# Altium PCB ARDUINO_UNO_CH340.PcbDoc
Units mil, origin at the board's own origin, x right, y up, seen from the top; angles counter-clockwise.
Board outline 2700 x 2100 mil, 2 copper layers (Top Layer, Bottom Layer); 51 components, 51 nets, 211 pads, 45 vias.
Unrouted connection lines stored in the file: 5.
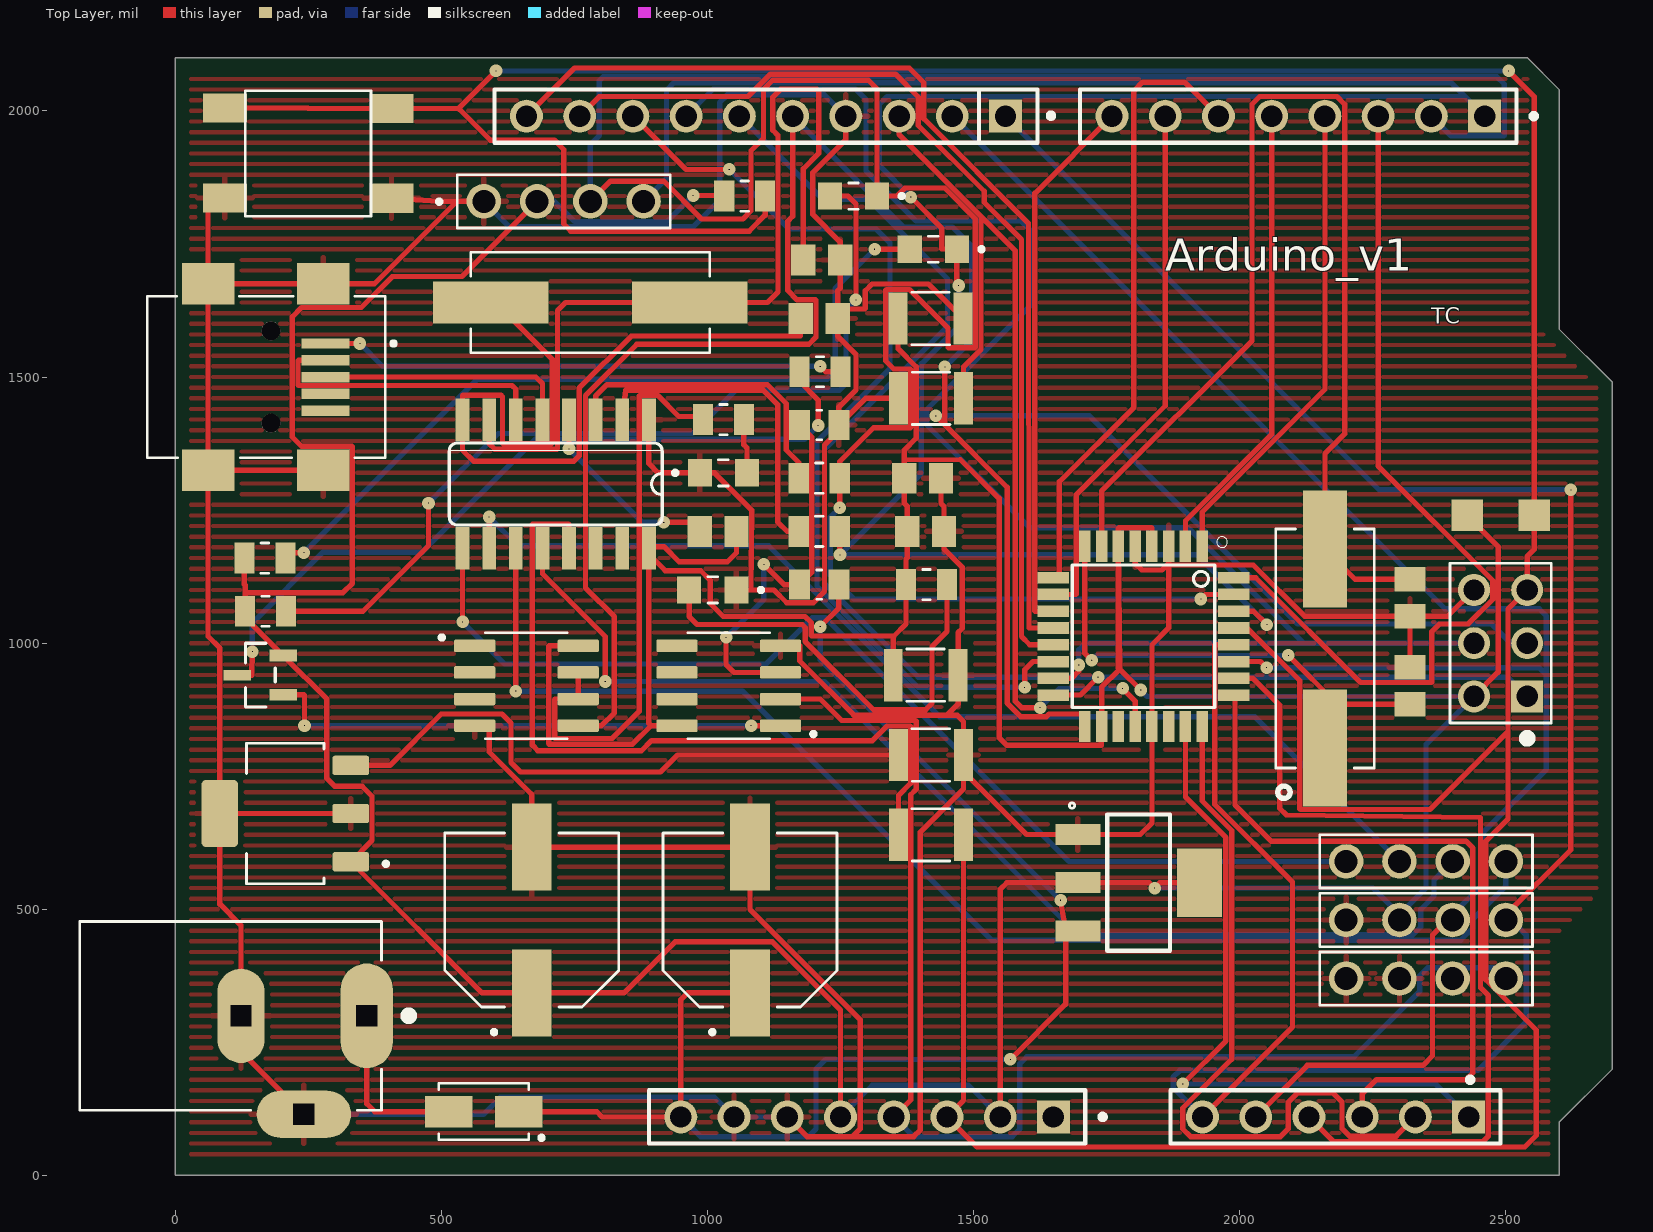
[diagram p0: Top Layer view]
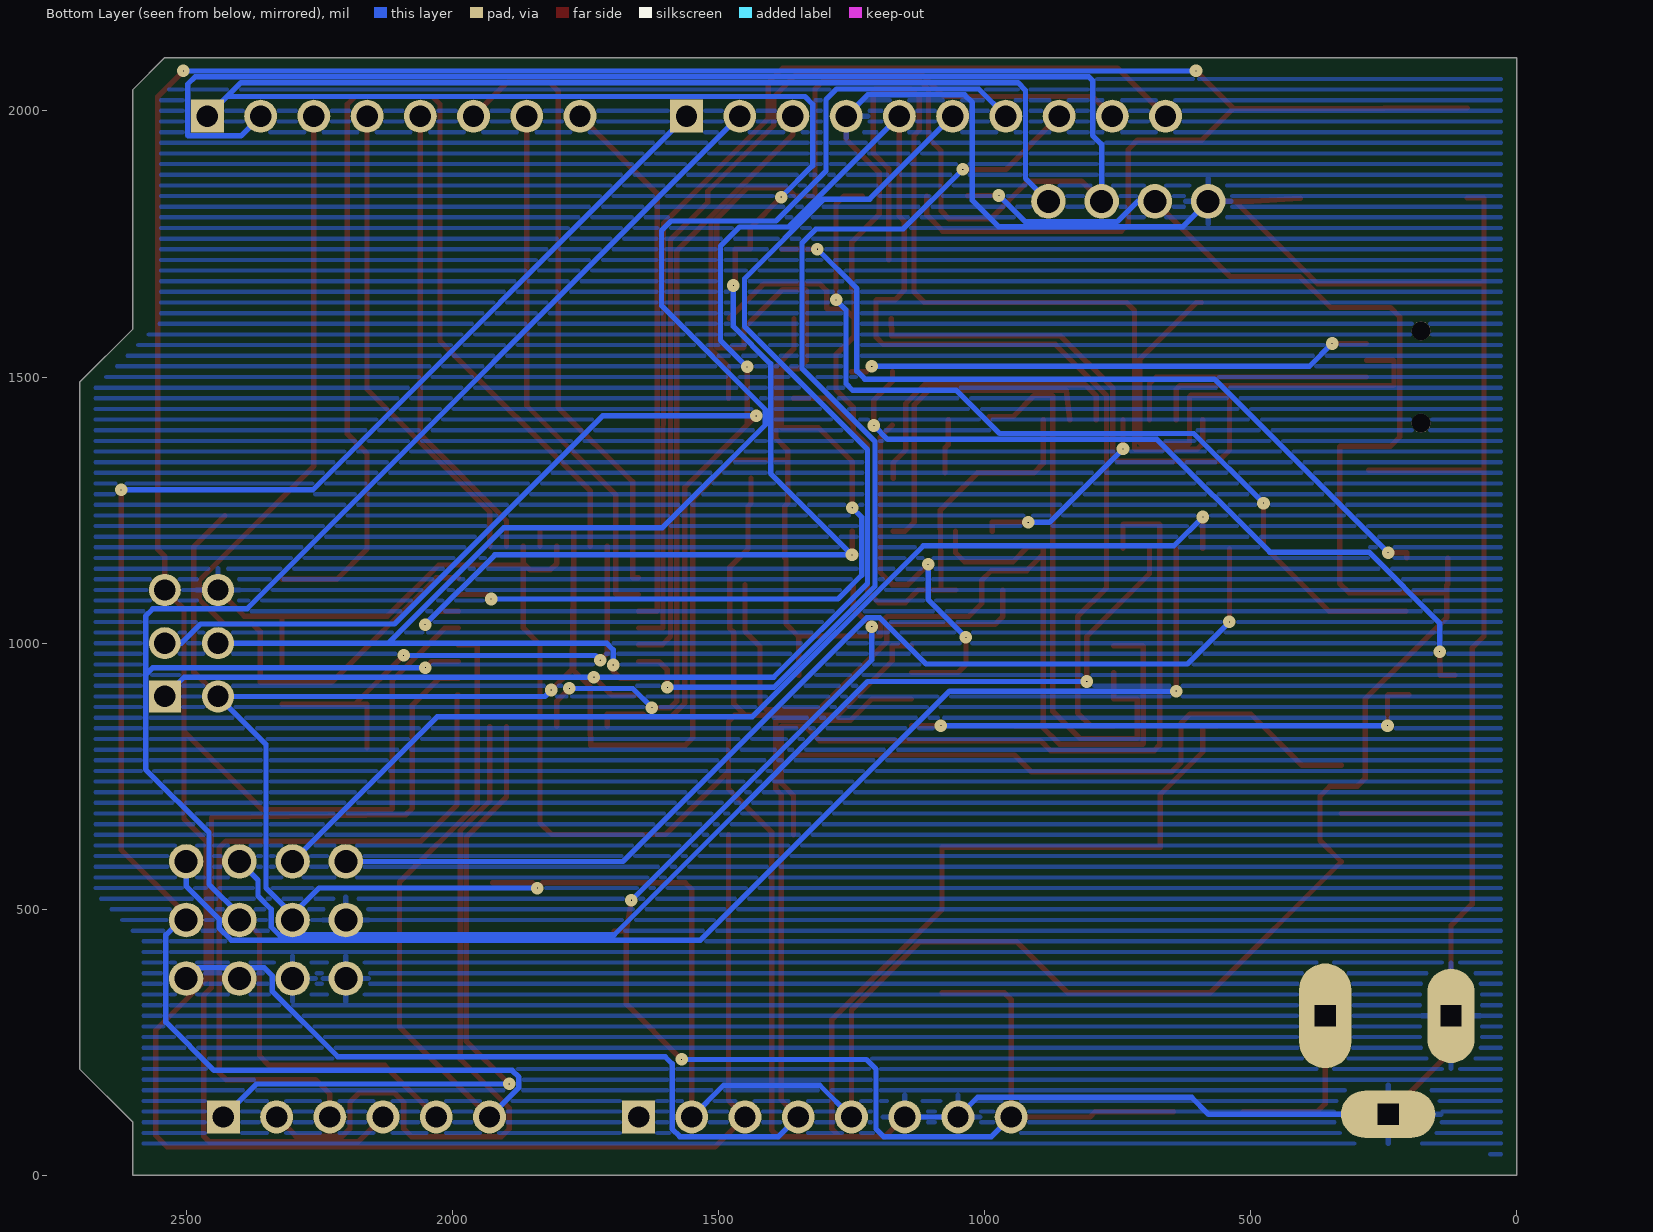
[diagram p1: Bottom Layer view, seen from below]
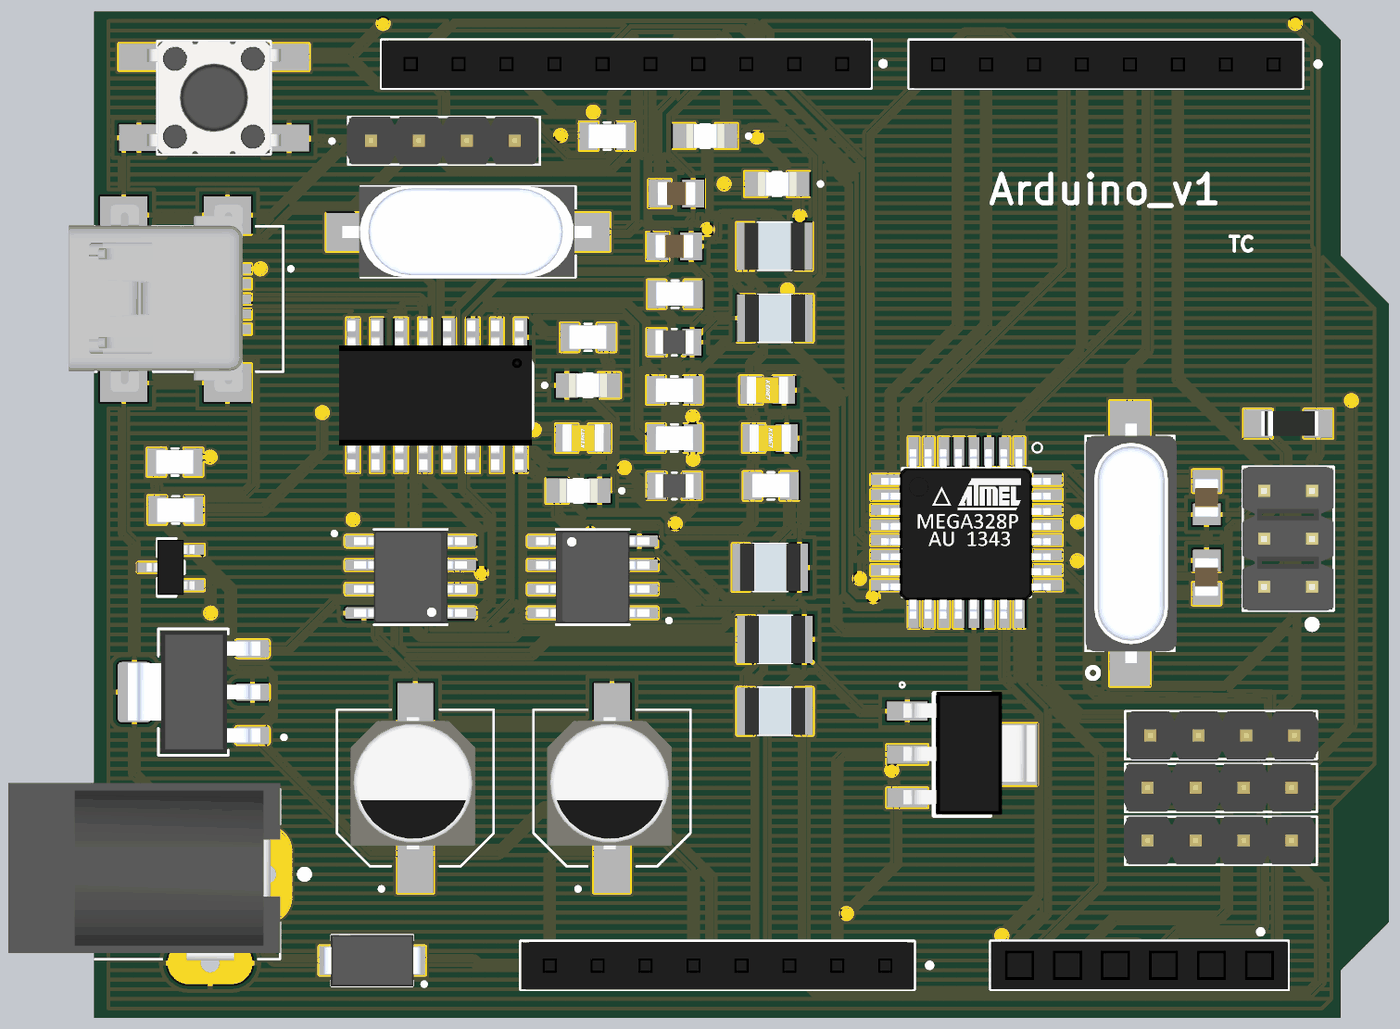
[diagram p2: 3D render of the assembled board from above, using the file's embedded part models]

## Layer stack, top to bottom
Top Solder: solder mask 0.4, Solder Resist, Dk 3.5
Top Layer: signal copper 1.4
Dielectric 1: dielectric 12.6, FR-4, Dk 4.8
Bottom Layer: signal copper 1.4
Bottom Solder: solder mask 0.4, Solder Resist, Dk 3.5

## Board outline
0,0 2600,0 2600,100 2700,200 2700,1490 2600,1590 2600,2040 2540,2100 0,2100

## Design rules (kind name [scope] priority, off if disabled: settings)
Clearance [All] p1: gap=0.2 ignorepadtopadclearanceinfootprint=FALSE
ComponentClearance [All] p1: gap=3.94 collisioncheckmode=3 verticalgap=7.87 showdistances=FALSE
HoleSize [All] p1: absolutevalues=TRUE maxlimit=393.7 minlimit=7.87 maxpercent=80.000 minpercent=20.000
HoleToHoleClearance [All] p1: gap=11.81 allowstackedmicrovias=TRUE
MinimumSolderMaskSliver [All] p1: minsoldermaskwidth=0
PolygonConnect [All] p1: connectstyle=Relief reliefconductorwidth=10 reliefentries=4 polygonreliefangle="90 Angle" airgapwidth=10
RoutingVias [All] p1: holewidth=0.3 width=23.62 viastyle="Through Hole" minholewidth=0.3 minwidth=23.62 maxholewidth=0.3 maxwidth=23.62
SilkToSilkClearance [All] p1: silktosilkclearance=0
SilkToSolderMaskClearance [IsPad] p1: minsilkscreentomaskgap=3.94 clearancetoexposedcopper=TRUE
SolderMaskExpansion [All] p1: expansion=3.94 istentingtop=FALSE
Width [All] p1: maxlimit=39.37 minlimit=11.81 preferedwidth=10
24 further rules are at their usual default settings.

## Classes and differential pairs
component class ARDUINO_UNO_CH340: 

## Components (designator, comment, footprint, x,y, rotation, side; value= is the part's Value field where it differs from the comment)
C1 "CAP ALUM 47UF 20% 25V SMD" CAP_25SVPD47M 1080,480 r90 top
C2 "CAP ALUM 47UF 20% 25V SMD" CAP_25SVPD47M 670,480 r90 top
C3 "C0805J104K5RACTU" CAPC2012X88N 1410,1210 r0 top
C4 "C0805J104K5RACTU" CAPC2012X88N 1404.45,1310 r0 top
C5 "CAP CER 25PF 100V NP0 0805" CAPC2012X94N 2320,920 r90 top
C6 "CAP CER 25PF 100V NP0 0805" CAPC2012X94N 2320,1085.35 r270 top
C7 "885012209041" WCAP-CSGP_885012209041 1420,790 r180 top
C8 "885012209041" WCAP-CSGP_885012209041 1410,940 r180 top
C9 "885012209041" WCAP-CSGP_885012209041 1420,1460 r0 top
C10 "885012209041" WCAP-CSGP_885012209041 1418.98,1610 r0 top
C11 "CAP CER 0805 10NF 50V C0G 1%" CAPC2012X88N 1020,1210 r180 top
C12 "885012209041" WCAP-CSGP_885012209041 1420,640 r180 top
C13 "CAP CER 25PF 100V NP0 0805" CAPC2012X94N 1210,1610 r0 top
C14 "CAP CER 25PF 100V NP0 0805" CAPC2012X94N 1214.65,1720 r0 top
CO1 "CRYSTAL 16.0000MHZ 18PF SMD" XTAL_ABLS2-24.000MHZ-D4YF-T 2160,990 r90 top
CP1 "CONN PWR JACK 2X5.5MM SOLDER" POWERJACK_CUI_PJ-002A 360,300 r180 top
D1 "S1M-FDITR-ND" DIODE_DIOM4226X244N 580,120 r180 top
D2 "7012X1" LED_7012X1 1424.29,1740 r180 top
D3 "7012X1" LED_7012X1 1274.29,1840 r180 top
D4 "DIODE GEN PURP 100V 150MA 1206" DIODE 2490,1240 r180 top
D5 "7012X1" LED_7012X1 1010,1100 r180 top
D6 "7012X1" LED_7012X1 1030,1320 r0 top
J1 "Conn_Sullins_PPTC081LFBN-RC_eec" Sullins_PPTC081LFBN-RC_0 1300,110 r180 top
J2 "Conn_Sullins_PPTC101LFBN-RC_eec" "Sullins_PPTC101LFBN-RC_0 - duplicate2" 1110,1990 r180 top
J3 "PPTC061LFBN-RC" Sullins_PPTC061LFBN-RC_0 2180,110 r180 top locked
J4 "Conn_Sullins_PPTC081LFBN-RC_eec" Sullins_PPTC081LFBN-RC_0 2110,1990 r180 top locked
J5 "1734035-4" J_SMD_1734035-4-5_0.8_9.9_8.85_3.9 180,1500 r270 top locked
J6 "67997-206HLF" FRAMATOME_67997-206HLF 2490,1000 r90 top locked
K1 "61300411121" 61300411121 2350,370 r180 top
K2 "61300411121" 61300411121 2350,480 r180 top
K3 "61300411121" 61300411121 730,1830 r180 top
K4 "61300411121" 61300411121 2350,590 r0 top
MC1 "ATMEGA328P-AU" QFP80P900X900X120-32N 1819.29,1012.76 r270 top
R1 "1kOhm,0805,1%,50ppm, 100mW,100VRN732ATTDK1001F50" RESC2012X60N 170,1060 r180 top
R2 "1kOhm,0805,1%,50ppm, 100mW,100VRN732ATTDK1001F50" RESC2012X60N 168.5,1160 r0 top
R3 "1kOhm,0805,1%,50ppm, 100mW,100VRN732ATTDK1001F50" RESC2012X60N 1210,1210 r180 top
R4 "1kOhm,0805,1%,50ppm, 100mW,100VRN732ATTDK1001F50" RESC2012X60N 1210,1310 r180 top
R5 "1kOhm,0805,1%,50ppm, 100mW,100VRN732ATTDK1001F50" RESC2012X60N 1411.5,1110 r0 top
R6 "1kOhm,0805,1%,50ppm, 100mW,100VRN732ATTDK1001F50" RESC2012X60N 1070,1840 r180 top
R7 "PICOSMDC050S-2" RESC2012X60N 1211.5,1510 r0 top
R8 "CRGCQ0805F10K" RESC2012X65N 1210,1110 r0 top
R9 "CRGCQ0805F10K" RESC2012X65N 1210,1410 r0 top
R10 "1kOhm,0805,1%,50ppm, 100mW,100VRN732ATTDK1001F50" RESC2012X60N 1030,1420 r0 top
S1 "2-1437565-8" SW_2-1437565-8 250,1920 r180 top
U1 "NCP1117ST50T3G" SOT230P700X180-4N 1810,550 r0 top
U2 "MCP1703T-3302E/DB" "SOT230P700X180-4N - duplicate" 206.97,680 r180 top
U3 "CH340 USB 2.0 to UART Interface Evaluation Board" SO16 715,1299 r180 top
U4 "LM358M/NOPB" SOIC127P599X175-8N 1040,920 r180 top
U5 "SI2301BDS-T1-E3" SOT95P237X112-3N 160,940 r180 top
U6 "LM358M/NOPB" SOIC127P599X175-8N 660,920 r0 top
Y1 "ECS-120-S-5PX-TR" XTAL_ECS-120-S-5PX-TR 780,1640 r180 top

## Footprints (in the part's own frame and the unit in brackets; to place one, negate y for a bottom-side part, rotate by r counter-clockwise, add the part's x,y. Pads: shape width x height; smd on the part's side, far side on the other; paste and mask are expansions set on the pad)
61300411121 [mm]
  round 1.65 hole 1.1: 1(-3.81,0) 2(-1.27,0) 3(1.27,0) 4(3.81,0)
  silkscreen extent -5.08,-1.27 5.08,1.27, body extent -5.01,-1.28 5.15,1.26, height 8.05
CAP_25SVPD47M [mm]
  rect 4.15x1.9 smd: 1(-3.475,0) 2(3.475,0)
  silkscreen extent -5.45,-4.15 4.15,4.15, body extent -3.25,-3.17 3.75,3.43, height 5.38
CAPC2012X88N [mm]
  rect 1.16x1.47 smd: 1(-0.875,0) 2(0.875,0)
  body extent -1.1,-0.73 1.1,0.72, height 0.98
CAPC2012X94N [mm]
  rect 1.16x1.47 smd: 1(-0.88,0) 2(0.88,0)
  body extent -1.01,-0.62 1.01,0.62, height 0.91
DIODE [mm]
  rect 1.5x1.5 smd: NEG(1.6,0) POS(-1.6,0)
  body extent -1.58,-0.65 1.42,0.65, height 0.75
DIODE_DIOM4226X244N [mm]
  rect 2.26x1.51 smd: 1(-1.67,0) 2(1.67,0)
  silkscreen extent -2.85,-1.35 2.15,1.35, body extent -2.6,-1.36 2.6,1.36, height 2.65
FRAMATOME_67997-206HLF [mm]
  rect 1.53x1.53 hole 1.02: 1(-2.54,-1.27)
  round 1.53 hole 1.02: 2(-2.54,1.27) 3(0,-1.27) 4(0,1.27) 5(2.54,-1.27) 6(2.54,1.27)
  silkscreen extent -4.74,-2.41 3.81,2.41, body extent -3.81,-2.41 3.81,2.41, height 8.39
J_SMD_1734035-4-5_0.8_9.9_8.85_3.9 [mm]
  rect 0.5x2.3 smd: 1(-1.6,2.6) 2(-0.8,2.6) 3(0,2.6) 4(0.8,2.6) 5(1.6,2.6)
  rect 2x2.5 smd: S1(-4.45,2.5) S2(4.45,2.5) S3(-4.45,-3) S4(4.45,-3)
  round 0.9 hole 0.9 unplated: ""(-2.2,0) ""(2.2,0)
  silkscreen extent -3.85,-5.9 3.85,5.95, body extent -4.99,-5.9 4.91,3.3, height 4.1
LED_7012X1 [mm]
  rect 1.15x1.3 smd: A(1.125,0) C(-1.125,0)
  silkscreen extent -2.4,-0.62 0.23,0.62, body extent -1.01,-0.62 1,0.62, height 0.75
POWERJACK_CUI_PJ-002A [mm]
  oval 2.5x5 hole 1 square: 1(0,0)
  oval 2.25x4.5 hole 1 square: 2(6,0)
  oval 4.5x2.25 hole 1 square: 3(3,4.7)
  silkscreen extent -2.2,-4.5 13.7,4.5, body extent -0.72,-4.83 13.68,4.57, height 11
QFP80P900X900X120-32N [mm]
  rect 1.5x0.55 smd: 1(-4.3,2.8) 2(-4.3,2) 3(-4.3,1.2) 4(-4.3,0.4) 5(-4.3,-0.4) 6(-4.3,-1.2) 7(-4.3,-2) 8(-4.3,-2.8) 17(4.3,-2.8) 18(4.3,-2) 19(4.3,-1.2) 20(4.3,-0.4) 21(4.3,0.4) 22(4.3,1.2) 23(4.3,2) 24(4.3,2.8)
  rect 0.55x1.5 smd: 9(-2.8,-4.3) 10(-2,-4.3) 11(-1.2,-4.3) 12(-0.4,-4.3) 13(0.4,-4.3) 14(1.2,-4.3) 15(2,-4.3) 16(2.8,-4.3) 25(2.8,4.3) 26(2,4.3) 27(1.2,4.3) 28(0.4,4.3) 29(-0.4,4.3) 30(-1.2,4.3) 31(-2,4.3) 32(-2.8,4.3)
  silkscreen extent -4.75,-3.4 3.4,4, body extent -4.42,-4.53 4.57,4.47, height 1.01
RESC2012X60N [mm]
  rect 0.96x1.47 smd: 1(-0.978,0) 2(0.978,0)
  silkscreen extent -0.18,-0.72 0.18,0.72, body extent -1.01,-0.61 0.99,0.64, height 0.61
RESC2012X65N [mm]
  rect 1x1.42 smd: 1(-0.935,0) 2(0.935,0)
  silkscreen extent -0.12,-0.7 0.12,0.7, body extent -0.99,-0.63 1.01,0.62, height 0.63
SO16 [mil]
  rect 26x80 smd: 1(-175,-121) 2(-125,-121) 3(-75,-121) 4(-25,-121) 5(25,-121) 6(75,-121) 7(125,-121) 8(175,-121) 9(175,121) 10(125,121) 11(75,121) 12(25,121) 13(-25,121) 14(-75,121) 15(-125,121) 16(-175,121)
  silkscreen extent -200,-77 200,77, body extent -197,-156 204,156, height 77
SOIC127P599X175-8N [mm]
  rrect25% 1.97x0.6 smd: 1(-2.47,1.905) 2(-2.47,0.635) 3(-2.47,-0.635) 4(-2.47,-1.905) 5(2.47,-1.905) 6(2.47,-0.635) 7(2.47,0.635) 8(2.47,1.905)
  silkscreen extent -4.14,-2.53 1.95,2.53, body extent -3,-2.45 3,2.45, height 1.73
SOT95P237X112-3N [mil]
  rect 52x22 smd: 1(-43,37) 2(-43,-37)
  rect 52x20 smd: 3(43,0)
  silkscreen extent -28,-60 28,60, body extent -49,-57 50,57, height 37
SOT230P700X180-4N [mm]
  rect 2.15x1 smd: 1(-2.9,2.3) 2(-2.9,0) 3(-2.9,-2.3)
  rect 2.15x3.25 smd: 4(2.9,0)
  silkscreen extent -3.3,-3.25 1.5,3.81, body extent -3.12,-3.2 3.88,3.3, height 1.65
"SOT230P700X180-4N - duplicate" [mm]
  rrect25% 1.76x0.92 smd: 1(-3.125,2.3) 2(-3.125,0) 3(-3.125,-2.3)
  rrect25% 1.76x3.19 smd: 4(3.125,0)
  silkscreen extent -4.9,-3.35 1.85,3.35, body extent -3.54,-3.26 3.46,3.24, height 1.8
Sullins_PPTC061LFBN-RC_0 [mm]
  rect 1.57x1.57 hole 1.02 paste-1000 mask+0: 1(-6.35,0)
  round 1.57 hole 1.02 paste-1000 mask+0: 2(-3.81,0) 3(-1.27,0) 4(1.27,0) 5(3.81,0) 6(6.35,0)
  silkscreen extent -7.87,-1.9 7.87,1.27, body extent -8.15,-1.47 8.15,1.47, height 0.25
Sullins_PPTC081LFBN-RC_0 [mm]
  rect 1.57x1.57 hole 1.02 paste-1000 mask+0: 1(-8.89,0)
  round 1.57 hole 1.02 paste-1000 mask+0: 2(-6.35,0) 3(-3.81,0) 4(-1.27,0) 5(1.27,0) 6(3.81,0) 7(6.35,0) 8(8.89,0)
  silkscreen extent -11.36,-1.27 10.41,1.27, body extent -10.69,-1.47 10.69,1.47, height 0.25
"Sullins_PPTC101LFBN-RC_0 - duplicate2" [mm]
  rect 1.57x1.57 hole 1.02 paste-1000 mask+0: 1(-11.43,0)
  round 1.57 hole 1.02 paste-1000 mask+0: 2(-8.89,0) 3(-6.35,0) 4(-3.81,0) 5(-1.27,0) 6(1.27,0) 7(3.81,0) 8(6.35,0) 9(8.89,0) 10(11.43,0)
  silkscreen extent -13.73,-1.27 12.95,1.27, body extent -13.23,-1.47 13.23,1.47, height 0.25
SW_2-1437565-8 [mm]
  rect 2.1x1.4 smd: 1(-3.974,2.135) 2(3.974,2.123) 3(-3.974,-2.148) 4(3.974,-2.168)
  silkscreen extent -6.35,-3 3,3, body extent -3.85,-3 3.85,3, height 4.13
WCAP-CSGP_885012209041 [mm]
  rect 0.9x2.5 smd: 1(-1.55,0) 2(1.55,0)
  silkscreen extent -0.9,-1.25 0.91,1.25, body extent -1.6,-1.25 1.6,1.25, height 0.96
XTAL_ABLS2-24.000MHZ-D4YF-T [mm]
  rect 5.6x2.1 smd: 1(-4.75,0) 2(4.75,0)
  silkscreen extent -7.15,-2.35 5.7,2.35, body extent -6.35,-2.48 6.35,2.35, height 4.03
XTAL_ECS-120-S-5PX-TR [mm]
  rect 5.5x2 smd: 1(-4.75,0) 2(4.75,0)
  silkscreen extent -5.7,-2.4 5.7,2.4, body extent -6.53,-2.4 6.67,2.4, height 4.31

## Part data
C1 C2: library part 25SVPD47M, "47 µF 25 V Aluminum Electrolytic Capacitors Radial, Can - SMD - 3000 Hrs @ 105°C", Package=None, Supplier Part Number 1=31T8177, Availability=Unavailable, MP=25SVPD47M, Price=None, Supplier 1=Newark
C3 C4: "CAP MLCC, 0.1UF, 50V, X7R, 10%, 0805; Product Range: KEMET - J Series; Capacitance", Package="0805 KEMET", Supplier Part Number 1=399-9997-1-ND, Availability=Warning, MF=KEMET, Mouser-Purchase-URL=https://snapeda.com/shop?store=Mouser&id=1757688, MP=C0805J104K5RACTU, Price=None, SnapEDA_Link=https://www.snapeda.com/parts/C0805J104K5RACTU/KEMET/view-part/1757688/?ref=snap, Supplier 1=Digi-Key
C5 C6 C13 C14: library part 08051A250GAT2A, "25 pF ±2% 100V Ceramic Capacitor C0G, NP0 0805 (2012 Metric)", Package=None, Supplier Part Number 1=08051A250GAT2A-ND, Availability=Unavailable, MP=08051A250GAT2A, Price=None, Supplier 1=Digi-Key
C7 C8 C9 C10 C12: "WCAP-CSGP General Purpose MLCC; SMT 1210; X7R; 100nF 10%; 50V; -55C to +125C; Tech. PN X7R1210104K050DFCT1000", Package=None, Availability=Unavailable, MP=885012209041, Price=None
C11: library part C0805C103F5GEC-ND, "±1% 50V Ceramic Capacitor C0G, NP0 0805 (2012 Metric)", Package="0805 KEMET", Availability=Warning, MF=KEMET, Mouser-Purchase-URL=https://snapeda.com/shop?store=Mouser&id=1757688, MP=C0805J104K5RACTU, Price=None, SnapEDA_Link=https://www.snapeda.com/parts/C0805J104K5RACTU/KEMET/view-part/1757688/?ref=snap, Supplier 1=Digi-Key, Supplier Part Number 1=C0805C103F5GEC-ND
CO1: library part ABLS2-24.000MHZ-D4YF-T, "24MHz Â±30ppm Crystal 18pF 40 Ohms HC-49/US", Package="HC49/US Abracon", Supplier Part Number 1=535-10212-1-ND, Availability=Good, Check_prices=https://www.snapeda.com/parts/ABLS2-24.000MHZ-D4YF-T/Abracon%20LLC/view-part/412221/?ref=eda, MF=Abracon, MP=ABLS2-24.000MHZ-D4YF-T, Price=None, Purchase-URL=https://pricing.snapeda.com/search/part/ABLS2-24.000MHZ-D4YF-T/?ref=eda, SnapEDA_Link=https://www.snapeda.com/parts/ABLS2-24.000MHZ-D4YF-T/Abracon%20LLC/view-part/412221/?ref=snap, Supplier 1=Digi-Key
CP1: library part CP-002A-ND, "Power Barrel Connector Jack 2.10mm ID (0.083\"), 5.50mm OD (0.217\") Through Hole, Right Angle", Supplier Part Number 1=PJ-002AH-SMT-TR, Supplier 1=Onlinecomponents.com
D1: library part DIODE_S1G, "DIODE GEN PURP 1KV 1A SMA", Package="DO-214AC-214 ON Semiconductor", Supplier Part Number 1=S1M-FDICT-ND, Availability=Unavailable, MF="ON Semiconductor", MP=ES1G, Price=None, SnapEDA_Link=https://www.snapeda.com/parts/ES1G/ON%20Semiconductor/view-part/1427700/?ref=snap, Supplier 1=Digi-Key
D2 D3 D5 D6: "Red LED Indication - Discrete 1.7V 0805 (2012 Metric)", Package=None, Supplier Part Number 1=732-4984-1-ND, Availability=Unavailable, MP=7012X1, Price=None, Supplier 1=Digi-Key
D4: library part CD1206-S01575, "Diode Standard 100V 150mA Surface Mount 1206", Package="1206 Bourns", Availability=Unavailable, MF=Bourns, MP=CD1206-S01575, Price=None, SnapEDA_Link=https://www.snapeda.com/parts/CD1206-S01575/Bourns%20-%20J.W.%20Miller/view-part/42622/?ref=snap, Supplier 1=Avnet, Supplier Part Number 1=CD1206-S01575
J1 J4: "CONN HEADER FEMALE 8POS .1\" TIN", Digikey Part Number=S7006-ND, Manufacturer=Sullins, Package=HDR8, Part Number=PPTC081LFBN-RC, Temperature="-40°C to +105°C", Temperature Range High=+105°C, Temperature Range Low=-40°C, ComponentLink1Description=Upverter, ComponentLink1URL=https://upverter.com/upn/revision/35dac8b21b21bbc7/, ComponentLink2Description=Datasheet, ComponentLink2URL=http://www.sullinscorp.com/drawings/78_P(N)PxCxxxLFBN-RC,_10492-H.pdf, Digikey Description="CONN HEADER FEMALE 8POS .1\" TIN", helpURL=https://upverter.com/upn/revision/35dac8b21b21bbc7/, Is Female=yes, Lead Free=yes, Price=0.506645376634, RoHS=TRUE, Supplier 1=Digi-Key, Supplier 2=Mouser, Supplier Part Number 1=S7006-ND
J2: "CONN HEADER FEMALE 10POS.1\" TIN", Digikey Part Number=S7008-ND, Manufacturer=Sullins, Octopart Part Number=a3ed6ae3a4397c2a, Package=HDR10, Part Number=PPTC101LFBN-RC, Temperature="-40°C to +105°C", Temperature Range High=+105°C, Temperature Range Low=-40°C, Category 75Fab8F04590Ae3D="Connectors and Adapters", Category 0836C53C3D42D3F1=Connectors, Category A3C16Ecb93907806=Uncategorized, Category Bda670Ac885E6661=Uncategorized, Category E7012A0Bd22E3Cc6="Headers & Receptacles", ComponentLink1Description=Upverter, ComponentLink1URL=https://upverter.com/upn/revision/438243a39a4aeeed/, ComponentLink2Description=Datasheet, ComponentLink2URL=http://www.sullinscorp.com/drawings/78_P(N)PxCxxxLFBN-RC,_10492-H.pdf, contact_material="Phosphor Bronze", Digikey Description="CONN HEADER FEMALE 10POS.1\" TIN", helpURL=https://upverter.com/upn/revision/438243a39a4aeeed/, housing_material=Plastic, Is Female=yes, Lead Free=yes, Mounting Type="through hole", Num Pins=10, Number_of_Positions=10, number_of_rows=1, pin_pitch="2.54 mm", Price=0.506714616829, RoHS=TRUE, Supplier 1=Digi-Key, Supplier 2=Mouser, Supplier Part Number 1=S7008-ND, Symbol 0 0=Standard, Type="integrated circuit"
J5: "Conn Mini USB 2.0 Type B RCP 5 POS 0.8mm Solder RA SMD 5 Terminal 1 Port Automotive T/R", Package=None, Centerline_Pitch=".8 mm[.031 in]", Digi-Key_Part_Number=A121554CT-ND, Digi-Key_Purchase_URL=https://www.digikey.com/product-detail/en/te-connectivity-amp-connectors/1734035-4/A121554CT-ND/5246531?utm_source=snapeda&utm_medium=aggregator&utm_campaign=symbol, EU_RoHS_Compliance=Compliant, MF="TE Connectivity", MP=1734035-4, Number_of_Positions=5, Product_Type=Connector, SnapEDA_Link=https://www.snapeda.com/parts/1734035-4/TE%20Connectivity%20AMP%20Connectors/view-part/422958/?ref=snap, TE_purchase_URL=https://www.te.com/usa-en/product-1734035-4.html?te_bu=Cor&te_type=disp&te_campaign=seda_glo_cor-seda-global-disp-prtnr-fy19-seda-model-bom-cta_sma-317_1&elqCampaignId=32493
J6: "Connector Header Through Hole 6 position 0.100 _2.54mm_", Package=None, Digi-Key_Part_Number=609-3234-ND, Digi-Key_Purchase_URL=https://www.digikey.com/product-detail/en/amphenol-icc-fci/67997-206HLF/609-3234-ND/1878491?utm_source=snapeda&utm_medium=aggregator&utm_campaign=symbol, MF="Amphenol ICC", MP=67997-206HLF, SnapEDA_Link=https://www.snapeda.com/parts/67997-206HLF/Amphenol%20FCI/view-part/103429/?ref=snap
K1 K2 K3 K4: "Connector Header Through Hole 4 position 0.100 (2.54mm)", Package=None, Availability="In Stock", Check_prices=https://www.snapeda.com/parts/61300411121/W%C3%BCrth%20Elektronik/view-part/4802916/?ref=eda, MF="WÃ¼rth Elektronik", MP=61300411121, Price=None, SnapEDA_Link=https://www.snapeda.com/parts/61300411121/W%C3%BCrth%20Elektronik/view-part/4802916/?ref=snap
MC1: "AVR AVRÂ® ATmega Microcontroller IC 8-Bit 20MHz 32KB _16K x 16_ FLASH 32-TQFP _7x7_", Package="TQFP-32 Microchip", Supplier Part Number 1=1310271, Availability=Unavailable, MF=Microchip, MP=ATMEGA328P-AU, Price=None, SnapEDA_Link=https://www.snapeda.com/parts/ATMEGA328P-AU/Microchip/view-part/44280/?ref=snap, Supplier 1=RSComponents
R1 R2 R3 R4 R5 R6 R10: "Thin Film Resistors - SMD 1kOhm,0805,1%,50ppm, 100mW,100V", Package=None, Supplier Part Number 1=7028531, Availability=Unavailable, MP=RN732ATTDK1001F50, Price=None, Supplier 1="Future Electronics"
R7: "Polymeric PTC Resettable Fuse 6V 500mA Ih Surface Mount 0805 _2012 Metric_, Concave", Package="0805 TE Connectivity", Supplier Part Number 1=PICOSMDC050S-2CT-ND, Availability=Unavailable, MF="Littelfuse Inc.", MP=PICOSMDC050S-2, Price=None, SnapEDA_Link=https://www.snapeda.com/parts/PICOSMDC050S-2/Littelfuse%20Inc./view-part/1315044/?ref=snap, Supplier 1=Digi-Key
R8 R9: "Fixed Resistor CRGCQ 0805 10K 1%", Package="2012 TE Connectivity", Supplier Part Number 1=A129761CT-ND, Arrow_Electronics-Purchase-URL=https://snapeda.com/shop?store=Arrow+Electronics&id=3188209, Availability=Unavailable, DigiKey-Purchase-URL=https://snapeda.com/shop?store=DigiKey&id=3188209, MF="TE Connectivity", MP=CRGCQ0805F10K, Price=None, SnapEDA_Link=https://www.snapeda.com/parts/CRGCQ0805F10K/TE%20Connectivity/view-part/3188209/?ref=snap, Supplier 1=Digi-Key
S1: "Tactile Switch SPST-NO Top Actuated Surface Mount", Contact_Current_Rating="50 mA", Package=None, Supplier Part Number 1=450-3355-ND, Availability=Unavailable, Configuration_Pole-Throw="Single Pole - Single Throw", MF="TE Connectivity", MP=2-1437565-8, Price=None, SnapEDA_Link=https://www.snapeda.com/parts/2-1437565-8/TE%20Connectivity%20ALCOSWITCH%20Switches/view-part/455292/?ref=snap, Supplier 1=Digi-Key, TE_purchase_URL=https://www.te.com/usa-en/product-2-1437565-8.html?te_bu=Cor&te_type=disp&te_campaign=seda_glo_cor-seda-global-disp-prtnr-fy19-seda-model-bom-cta_sma-317_1&elqCampaignId=32493
U1: "Linear Voltage Regulator IC 1 Output 1A SOT-223", Package="TO-261-4 ON Semiconductor", Supplier Part Number 1=71J6563, Availability=Unavailable, MF="ON Semiconductor", MP=NCP1117ST50T3G, Price=None, SnapEDA_Link=https://www.snapeda.com/parts/NCP1117ST50T3G/ON%20Semiconductor/view-part/836318/?ref=snap, Supplier 1=Newark
U2: "Linear Voltage Regulator IC 1 Output 250mA SOT-223-3", Package="SOT-223-3 Microchip", Availability=Unavailable, MF=Microchip, MP=MCP1703T-3302E/DB, Price=None, SnapEDA_Link=https://www.snapeda.com/parts/MCP1703T-3302E/DB/Microchip/view-part/1037153/?ref=snap
U3: library part CH340, Package=None, Supplier Part Number 1=317990026, Availability=Unavailable, MF=DFRobot, MP=CH340, Price=None, SnapEDA_Link=https://www.snapeda.com/parts/CH340/DFRobot/view-part/53354/?ref=snap, Supplier 1=Onlinecomponents.com
U4 U6: "2-Channel, 1MHz, industry standard, 32V op amp 8-SOIC 0 to 70", Package="SOIC-8 Texas Instruments", Check_prices=https://www.snapeda.com/parts/LM358M/Texas%20Instruments/view-part/4800527/?ref=eda, Digi-Key_Part_Number=LM358MX/NOPBTR-ND, DigiKey-Purchase-URL=https://snapeda.com/shop?store=DigiKey&id=4800527, MF="Texas Instruments", MP=LM358M, SnapEDA_Link=https://www.snapeda.com/parts/LM358M/Texas%20Instruments/view-part/4800527/?ref=snap
U5: "P-Channel 20V 2.2A _Ta_ 700mW _Ta_ Surface Mount SOT-23-3 _TO-236_", Package="SOT-23-3 Vishay", Availability=Unavailable, MF=Vishay, MP=SI2301BDS-T1-E3, Price=None, SnapEDA_Link=https://www.snapeda.com/parts/SI2301BDS-T1-E3/Vishay%20Siliconix/view-part/277675/?ref=snap
Y1: "12MHz Â±30ppm Crystal Series 50 Ohms HC-49/US", Package="HC49/US ECS International", Arrow_Electronics-Purchase-URL=https://snapeda.com/shop?store=Arrow+Electronics&id=2458096, Availability=Unavailable, DigiKey-Purchase-URL=https://snapeda.com/shop?store=DigiKey&id=2458096, MF="ECS Inc.", Mouser-Purchase-URL=https://snapeda.com/shop?store=Mouser&id=2458096, MP=ECS-120-S-5PX-TR, Price=None, SnapEDA_Link=https://www.snapeda.com/parts/ECS-120-S-5PX-TR/ECS%20Inc./view-part/2458096/?ref=snap

## Via types
v1: diameter 23.62, hole 0.3, Top Layer to Bottom Layer, 45 vias

## Nets (pads, with @x,y where several pads share a name; then routed paths per layer and width w, separated by ;. In a path a pad name is that pad's centre, name@x,y a point inside that pad or via, vN(x,y) a via of type N, cw(c..) or ccw(c..) an arc to the next point about the centre after c; other vN are vias at no path point)
+3V: J1.4 K1.1 K1.2 U4.2 | length 2418.4
  Top Layer w10: U4.2 1212,895 1252.39,854.61 1391,854.61 1392.09,853.52 1392.09,725.39 1382,715.29 1382,142 J1.4
  Bottom Layer w10: J1.4 1387,73 1572.5,73 1587,87.5 1587,210 1600,223 2215,223 2338,346 2338,375 2353,390 K1.1@2500,390
+3V3: C7.2 U2.3 | length 1170.7
  Top Layer w10: U2.3 403.55,770.55 500,867 614,867 631,850 631,776 649,758 912,758 944,790 C7.2
+5: C2.1 C3.1 C4.1 C8.2 C10.1 C11.1 D4.NEG J1.2 J1.5 J6.2 K2.3 K3.3 MC1.4 MC1.6 MC1.18 R1.2 R2.1 R5.1 R6.2 U1.2 U1.4 U2.1 U3.16 U4.8 U5.2 U6.8 | length 10901.4
  Top Layer w10: R2.1 130,1110.5 131.5,1109 131.5,1094 ; C2.1 C2.1@670,343 ; K3.3 539,1689 408,1689 349.62,1630.62 237.5,1630.62 220,1613.12 220,1387.5 237.5,1370 332,1370 333,1369 333,1112.5 315.5,1095 132.5,1095 131.5,1094 ; U6.8 703,995 702,994 702,811.4 703,810.4 859.4,810.4 893,844 ; U4.8 894,845 ; v1(973,1841) 1031.5,1841 R6.2 ; C11.1 1054.45,1169.95 1037.5,1153 946.8,1153 918.4,1181.4 890,1181.4 U3.16 U3.16@890,1167 ; J1.5 1250,311 1122,439 939,439 843,343 C2.1@670,343 ; C8.2 1348.98,1012 1349.98,1013 ; C10.1 1357.95,1553.37 1392.09,1519.23 1392.09,1385 1370,1362.91 1370,1344 ; J1.2 1550,537.5 1562.5,550 U1.2 1830,550 v1(1840,540) 1850,550 U1.4 ; v1(1814,912) 1776,950 1773.05,950 ; MC1.4 1835.04,1216 1834.04,1217 1773.05,1217 1772.05,1216 MC1.6 ; D4.NEG 2485.52,1181.49 2485.52,945.52 J6.2 ; 131.5,1094 R1.2 131.5,1048.5 U5.2 285,895 285,746 300,731 351.5,731 370,712.5 370,629.45 U2.1 576.45,343 C2.1@670,343 ; U3.16@890,1167 890,849 893,846 ; U3.16@890,1167 921,1136 987.5,1136 1005,1118.5 1005,1075 1029.78,1050.22 1183.25,1050.22 1194.99,1038.49 1194.99,1014.5 1196,1013.49 1347.49,1013.49 1347.98,1013 1349.98,1013 ; 893,844 894,845 ; 893,844 893,846 ; 893,846 894,845 ; 1349.98,1013 1372.99,1036.02 R5.1 1372.99,1158 1375.55,1160.56 C3.1 1375.55,1257 1370,1262.55 C4.1 1370,1344 ; 1370,1344 1475,1345 1548,1272 1548,822.5 1562.5,808 1739.55,808 MC1.18 1740.55,917.5 1773,949.95 ; MC1.6 1772.05,953.95 1773,953 1773,949.95 ; MC1.6 1774.52,951.48 1773.05,950 ; 1773,949.95 1773.05,950
  Bottom Layer w10: K3.3 712.5,1830 750.18,1792.32 924.32,1792.32 v1(973,1841) ; J1.5 1309.59,169.59 1490.41,169.59 J1.2 ; v1(1814,912) 1826,900 J6.2 2350,810 2350,540 2300,490 2250,540 v1(1840,540)
AD0: J3.1 MC1.23 | length 1299.2
  Top Layer w10: v1(1893,172) 1974,253 1974,635 1898.03,710.97 MC1.23
  Bottom Layer w10: v1(1893,172) 2368,172 J3.1
AD1: J3.2 MC1.24 | length 1401.1
  Top Layer w10: MC1.24 1929.53,703.47 1985,648 1985,218.5 1893,126.5 1893,87.5 1907.5,73 2076.5,73 2091,87.5 2091,137.5 2108.5,155 2175,155 2192,138 2192,88 2206.11,73.89 2293.89,73.89 J3.2
AD2: J3.3 MC1.25 | length 1379.1
  Top Layer w10: MC1.25 1991,902.52 1991,696 2059,628 2425,628 2438,615 2438,193 2425,180 2257,180 2230,153 J3.3
AD3: J3.4 MC1.26 | length 1648.6
  Top Layer w10: MC1.26 2025,934.02 2075,884.02 2075,689.85 2087.5,677.35 2452.12,672.38 2452.12,352.88 2467,338 2467,74 2456.69,63.69 2176.31,63.69 J3.4
AD4/SDA: J2.2 J3.5 K2.2 MC1.27 | length 3397.1
  Top Layer w10: MC1.27 2039,965.51 v1(2050.51,954) ; J3.5 2127,207 2344,207 2362,225 2362,452 2395,485 K2.2@2400,490
  Bottom Layer w10: J2.2 2385.32,1064.68 2562.5,1064.68 2576,1051.18 2576,940.5 ; v1(2050.51,954) 2562.5,954 2576,940.5 ; K2.2@2400,490 2457,547 2457,644 2576,763 2576,940.5
AD5/SCL: J2.1 J3.6 K2.1 MC1.28 | length 4275
  Top Layer w10: J3.6 2099,279 2099,551 1953,697 1953,996.01 1954,997.01 MC1.28 ; K2.1@2500,490 2622,612 v1(2622,1288)
  Bottom Layer w10: J2.1 2262,1288 v1(2622,1288) ; J3.6 1875,165 1875,185 1887.5,197.5 2447.5,197.5 2538,288 2538,452 K2.1@2500,490
Aref: C9.2 J2.3 MC1.20 | length 1848
  Top Layer w10: J2.3 1360,1955.83 1514,1801.83 ; C9.2 1481.02,1519.02 1514,1552 1514,1801.83 ; v1(1625,879) 1590,879 1578,891 1578,1737.83 1514,1801.83 ; v1(1780,915) 1803.54,891.46 MC1.20
  Bottom Layer w10: v1(1625,879) 1661,915 v1(1780,915)
GND: C1.2 C2.2 C3.2 C4.2 C5.2 C6.2 C7.1 C8.1 C9.1 C10.2 C13.2 C14.2 CP1.2 CP1.3 D5.C D6.C J1.6 J1.7 J2.4 J5.S1 J5.S2 J5.S3 J5.S4 J6.6 K1.3 K1.4 K2.4 K3.4 MC1.3 MC1.5 MC1.21 R9.2 S1.1 S1.2 U1.1 U2.2 U2.4 U3.1 U4.4 U6.4 | length 12005.4
  Top Layer w10: S1.2 61.89,1836.43 J5.S3 ; CP1.3 123.78,233.07 CP1.2 123.78,470 83.94,509.84 U2.4 ; J5.S2 J5.S4 ; U2.2 U2.4 ; S1.1 495.93,1830 529,1830 ; U6.4 590,845 590,796 670,716 C2.2 C1.2 1080,500 1287,293 1287,87.5 1272.5,73 ; K3.4 529,1830 ; U3.1 890,1337.5 907.5,1320 D6.C 1013,1320 1083,1250 1082,1100 ; D5.C 1082,1100 ; U4.4 1173.43,995 1173.43,966.39 1275,864.81 1450,864.81 ; J1.6 1187,73 1272.5,73 ; J2.4 1260,1946 1198,1884 1198,1805.29 1249.29,1754 C14.2 1249.29,1666.65 1244.65,1662 C13.2 ; C9.1 1296.81,1460 R9.2 ; C4.2 1438.9,1262.55 1444.45,1257 C3.2 1444.45,1177 1479,1142.45 1479,1028 1471.02,1020.02 C8.1 1471.02,885.84 1450,864.81 ; C10.2 1415.39,1674.61 1309.26,1674.61 1296.5,1661.86 1296.5,1629 1295.34,1627.83 1262.48,1627.83 C13.2 ; MC1.5 1803.54,1150 1816.04,1137.5 1854.04,1137.5 1866.54,1150 ; MC1.3 1866.54,1150 ; C5.2 C6.2 ; J6.6 2390.71,1050.71 C6.2 ; J5.S4 61.89,1013.05 83.94,991 U2.4 ; J5.S4 J5.S3 ; J5.S3 J5.S1 374.2,1675.2 529,1830 ; 1082,1100 1125,1100 1149,1076 1199,1076 1220,1097 1220,1372 1246.81,1398.81 R9.2 ; C13.2 1244.65,1577 1279,1542.65 1279,1476 1246.81,1443.81 R9.2 ; 1272.5,73 1387.5,73 1400,85.5 1400,644.98 1481.02,726 C7.1@1481.02,759 ; 1450,864.81 1469.21,864.81 1481.02,853 C7.1 C7.1@1481.02,759 ; C7.1@1481.02,759 1599.47,640.55 U1.1 1813.09,640.55 1835.04,662.5 MC1.21 1835.04,997 1866.54,1028.5 1866.54,1148 ; 1866.54,1148 1866.54,1150 ; 1866.54,1148 1867.54,1147 2025.37,1147 2121.66,1050.71 C6.2
  Bottom Layer w10: CP1.3 579,114.96 611.04,147 1013,147 J1.7 J1.6 ; K3.4 627.88,1782.12 973.12,1782.12 1023,1832 1023,2015.5 1037.5,2030 1220,2030 J2.4
IO0/RX: D2.C J4.1 K3.1 MC1.30 R3.1 | length 4891
  Top Layer w10: R3.1 1248.5,1166.5 v1(1249,1166) ; v1(1382,1838) 1440,1780 1440,1741 D2.C 1468.58,1675.42 v1(1472,1672) ; MC1.30 2026,1060 v1(2051,1035)
  Bottom Layer w10: K3.1 923,1873 923,2038.5 937.5,2053 2397,2053 2423,2027 ; v1(1382,1838) 1323,1897 1323,2012.5 1337.5,2027 2423,2027 ; v1(1472,1672) 1472,1595 1401.79,1524.79 1401.79,1318.79 v1(1249,1166) 1920,1166 v1(2051,1035) ; J4.1 2423,2027
IO1/TX: D3.C J4.2 K3.2 MC1.31 R4.1 | length 5357.5
  Top Layer w10: K3.2 818,1868 918,1868 989,1797 1066.5,1797 1082,1812.5 1082,1925 1105.19,1948.19 1105.19,2040.19 1122.44,2057.44 1302.56,2057.44 1318.58,2041.42 D3.C 1355.81,1840 1370.82,1855.01 1445.85,1855.01 1503,1797.87 1503,1556 1502,1555 1453,1555 1452,1556 1452,1591.87 1379.46,1664.41 1336.45,1664.41 1335.03,1663 1335.03,1529.97 1350,1515 1380.89,1515 1381.89,1514 1381.89,1406 1380.89,1405 1312.5,1405 1248.5,1341 R4.1 v1(1248.5,1254.5) ; v1(1927,1083) 1935.5,1091.5 MC1.31
  Bottom Layer w10: K3.2 780,1937 797,1954 797,2057 804,2064 2483,2064 2497,2050 2497,1954 2496,1953 2397,1953 J4.2 ; v1(1248.5,1254.5) 1231,1237 1231,1127.59 1275.59,1083 v1(1927,1083)
IO2: J4.3 MC1.32 | length 1685.6
  Top Layer w10: MC1.32 2030,1122.99 2226.99,926 2360,926 2361,927 2361,1022 2375,1036 2429,1036 2475.32,1082.32 2475.32,1117.68 2260,1333 J4.3
IO3: J4.4 MC1.1 | length 903.4
  Top Layer w10: MC1.1 1929.53,1246.53 2160,1477 J4.4
IO4: J4.5 MC1.2 | length 875
  Top Layer w10: MC1.2 1898.03,1230.03 2060,1392 J4.5
IO5: J4.6 MC1.9 | length 1175.8
  Top Layer w10: MC1.9 1661,1122.99 1661,1303 1801,1443 1801,2037.5 1817.5,2054 1896,2054 J4.6
IO6: J4.7 MC1.10 | length 1010.1
  Top Layer w10: MC1.10 1692,1091.5 1693,1092.5 1693,1279 1860,1446 J4.7
IO7: J4.8 MC1.11 | length 1024.5
  Top Layer w10: MC1.11 1616,1060 1615,1061 1615,1845 J4.8
IO8: J2.10 MC1.12 | length 1947.2
  Top Layer w10: J2.10 750.4,2080.4 1379.1,2080.4 1406.31,2053.19 1406.31,1985.33 1603,1788.64 1604,1028.5 MC1.12
IO9: J2.9 MC1.13 | length 1846.9
  Top Layer w10: J2.9 797,2027 1076.36,2027 1118.36,2069 1353.21,2069 1396.11,2026.11 1396.11,1972.89 1520,1849 1520,1828 1590,1758 1590,1012.5 1605.49,997.01 MC1.13
MISO: J2.6 J6.1 MC1.16 | length 2691.3
  Top Layer w10: MC1.16 1700.52,902.52 v1(1734,936)
  Bottom Layer w10: J2.6 1215.8,1834.2 1301.38,1834.2 1451,1684.57 1451,1595 1220,1364 1220,1112.2 1396.2,936 v1(1734,936) 2504,936 J6.1
MOSI: J2.7 J6.4 MC1.15 | length 3021.2
  Top Layer w10: MC1.15 1684,934.02 1697.5,947.52 v1(1697.5,959.02)
  Bottom Layer w10: J2.7 1011,2041 1278,2041 1298,2021 1298,1887 1392,1793 1589,1793 1607,1775 1607,1634 1411.99,1438.99 1411.99,1410 1604.99,1217 1903,1217 2120,1000 ; v1(1697.5,959.02) 1697.5,987.5 1710,1000 2120,1000 ; J6.4 2120,1000
NetC5_1: C5.1 CO1.1 MC1.8 | length 964.6
  Top Layer w10: MC1.8 1709.06,980.94 v1(1722,968) ; v1(2091.5,977) CO1.1@2183.15,885.35 ; CO1.1 2160,885.35 CO1.1@2183.15,885.35 ; C5.1 CO1.1@2183.15,885.35
  Bottom Layer w10: v1(1722,968) 1731,977 v1(2091.5,977)
NetC6_1: C6.1 CO1.2 MC1.7 | length 2167.9
  Top Layer w10: MC1.7 1740.55,1285.55 2023,1568 2023,2012.5 2037.5,2027 2182.5,2027 2197,2012.5 2197,1393 2160,1356 CO1.2 2217.01,1120 C6.1
NetC11_2: C11.2 U3.4 | length 374.7
  Top Layer w10: v1(740,1365) U3.4 ; v1(918,1227) 985.55,1227 C11.2
  Bottom Layer w10: v1(740,1365) 878,1227 v1(918,1227)
NetC12_2: C12.2 U3.13 | length 1476.9
  Top Layer w10: U3.13 740,1223 739,1224 672,1224 671,1223 671,808.5 681.5,798 876,798 895,817 1310.06,817 1337.47,844.41 1380.48,844.41 1381.89,843 1381.89,737 1358.98,714.08 C12.2
NetC13_1: C13.1 U3.8 Y1.2 | length 1525.1
  Top Layer w10: Y1.2 602,1640 708.2,1533.8 708.2,1376 707,1374.8 616,1374.8 615,1375.8 615,1463 612,1466 541,1466 540,1465 U3.8 540,1362.5 560.5,1342 749,1342 759,1352 759,1479 857,1577 1174.35,1577 C13.1
NetC14_1: C14.1 U3.7 Y1.1 | length 1659.1
  Top Layer w10: U3.7 590,1375 600.69,1364.31 717,1364.31 718.4,1365.71 718.4,1625 733.4,1640 Y1.1 1112.5,1640 1132.6,1660.1 1132.6,1954 1123,1963.6 1123,2026 1137.5,2040.5 1206,2040.5 1209,2037.5 1209,1920 1180,1891 C14.1
NetCP1_1: CP1.1 D1.2 | length 325.5
  Top Layer w10: CP1.1 360,135 375,120 D1.2
NetD2_A: D2.A R2.2 | length 1509.9
  Top Layer w10: R2.2 207.01,1170 v1(242,1170) ; v1(1314,1740) D2.A
  Bottom Layer w10: v1(242,1170) 568,1496 1225,1496 1240,1511 1240,1666 v1(1314,1740)
NetD3_A: D3.A R1.1 | length 1676.1
  Top Layer w10: R1.1 353,1060 476,1183 v1(476,1263) ; D3.A 1264,1840 1279,1825 v1(1279,1645)
  Bottom Layer w10: v1(476,1263) 607,1394 972,1394 1053,1475 1247.7,1475 1260.2,1487.5 1260.2,1626.2 v1(1279,1645)
NetD5_A: D5.A R5.2 | length 833.5
  Top Layer w10: D5.A 965.71,1050 980.71,1035 1178.08,1035 1183.63,1029.45 1183.63,1003.5 1312.11,875.01 1410.01,875.01 1422,887 1422,994 1450,1022 R5.2
NetD6_A: D6.A R10.2 | length 102.4
  Top Layer w10: R10.2 1068.5,1372.79 1074.29,1367 D6.A
NetJ5_1: J5.1 R7.2 | length 989.6
  Top Layer w10: J5.1 v1(347.01,1562.99) ; v1(1212,1520) 1222,1510 R7.2
  Bottom Layer w10: v1(347.01,1562.99) 390,1520 v1(1212,1520)
NetJ5_2: J5.2 U3.6 | length 566.6
  Top Layer w10: J5.2 232,1531.5 231,1530.5 231,1485 232,1484 633,1484 640,1477 U3.6
NetJ5_3: J5.3 U3.5 | length 480.3
  Top Layer w10: J5.3 677.5,1500 690,1487.5 U3.5
NetK4_1: K4.1 U3.9 | length 2056.5
  Top Layer w10: v1(540,1040) U3.9
  Bottom Layer w10: v1(540,1040) 619,961 1110.01,961 1197.02,1048.01 1221.2,1048.01 1679.21,590 K4.1
NetK4_2: K4.2 U3.10 | length 2037
  Top Layer w10: U3.10 v1(590,1237)
  Bottom Layer w10: v1(590,1237) 644,1183 1115,1183 1436.01,861.99 2028.01,861.99 K4.2
NetK4_3: K4.3 U3.12 | length 2181.8
  Top Layer w10: U3.12 690,1130.5 808,1012.5 v1(808,928)
  Bottom Layer w10: v1(808,928) 1220,928 1695.68,452.32 2325.32,452.32 2340,467 2340,500 2365,525 2365,555 K4.3
NetK4_4: K4.4 U3.11 | length 2420
  Top Layer w10: v1(640,909.99) U3.11
  Bottom Layer w10: v1(640,909.99) 1065.78,909.99 1533.65,442.12 2415.12,442.12 2438,465 2438,482 2500,544 K4.4
NetR3_2: R3.2 U3.2 | length 619.7
  Top Layer w10: U3.2 846.4,1475.4 1104.6,1475.4 1132,1448 1132,1228 1150,1210 R3.2
NetR4_2: R4.2 U3.3 | length 575.5
  Top Layer w10: U3.3 790,1464.2 811.4,1485.6 1112.4,1485.6 1148,1450 1148,1363 1171.5,1339.5 R4.2
NetR7_1: R7.1 U5.3 | length 1457.2
  Top Layer w10: U5.3 144,940 v1(145,984) ; R7.1 1172.99,1492 1208,1456.99 v1(1208,1409)
  Bottom Layer w10: v1(145,984) 145,1038 278,1171 464,1171 676,1383 1182,1383 v1(1208,1409)
NetR8_1: R8.1 R9.1 U4.3 | length 727.7
  Top Layer w10: v1(1035,1011) 1035,960 1050,945 U4.3 ; v1(1106,1148) 1144,1110 R8.1 1196,1132.81 1196,1387.05 1173.19,1409.86 R9.1
  Bottom Layer w10: v1(1035,1011) 1106,1082 v1(1106,1148)
NetR10_1: R10.1 U6.6 U6.7 | length 1081.5
  Top Layer w10: U6.7 U6.6 714,895 713,894 713,822 714,821 821,821 871.8,871.8 871.8,1464 873,1465.2 907,1465.2 946.2,1426 991.5,1426 R10.1
NetU4_1: U4.1 U5.1 | length 991.7
  Top Layer w10: U5.1 242,903 243,902 v1(243,845) ; v1(1082,845) U4.1
  Bottom Layer w10: v1(243,845) v1(1082,845)
Reset: C12.1 D4.POS J1.3 J6.5 MC1.29 R6.1 S1.3 S1.4 | length 7881.2
  Top Layer w10: S1.4 249,2005.34 249.76,2004.58 S1.3 532.42,2004.58 534,2006.16 ; v1(602.84,2075) 534,2006.16 ; R6.1 1108.5,1804 1078.5,1774 743.5,1774 730,1787.5 730,1927.5 712.5,1945 592,1945 534,2003 534,2006.16 ; C12.1 1481.02,141.02 J1.3 1506.51,53.49 2535.49,53.49 2557,75 2557,273 2462.32,367.68 2462.32,628 2504,669.68 2504,834 ; MC1.29 2014,1028.5 2113,929.5 2113,688.55 2114,687.55 2357.55,687.55 2504,834 ; v1(2504.99,2075) 2552.99,2027 D4.POS 2552.99,1175.99 2540,1163 J6.5 2504,1064 2504,834
  Bottom Layer w10: v1(602.84,2075) v1(2504.99,2075)
SCK: J2.5 J6.3 MC1.17 U6.5 | length 4494.4
  Top Layer w10: U6.5 801,845 825.05,869.05 825.05,1049.95 771,1104 771,1465 867.5,1561.5 1190.5,1561.5 1204,1575 1204,1644 1203,1645 1168.5,1645 1151,1662.5 1151,1793 1160,1802 J2.5 ; v1(1429,1427) 1446,1410 ; v1(1446,1519) 1446,1410 ; MC1.17 1709.06,867 1641.73,867 1636.72,861.99 1588.51,861.99 1563,887.5 1563,1293 1446,1410
  Bottom Layer w10: J2.5 1368,1782 1460,1782 1496,1746 1496,1569 v1(1446,1519) ; v1(1429,1427) 1717.57,1427 2108.57,1036 2473,1036 2509,1000 J6.3
SS: J2.8 MC1.14 | length 1845.5
  Top Layer w10: J2.8 960,1890 v1(1041,1890) ; v1(1596,917) 1596,950 1611.51,965.51 MC1.14
  Bottom Layer w10: v1(1041,1890) 1153,1778 1317.04,1778 1343,1752.04 1343,1516 1206,1379 1206,1107 1396,917 v1(1596,917)
VIN: C1.1 D1.1 J1.8 R8.2 U1.3 | length 2584.7
  Top Layer w10: D1.1 792,120 802,110 J1.8 950,330.69 962.5,343.19 C1.1 ; v1(1212,1031) 1246.81,1065.81 R8.2 ; v1(1569,218) 1673,322 U1.3@1673,459.45 ; v1(1663.5,517) U1.3@1673,459.45 ; U1.3 U1.3@1673,459.45
  Bottom Layer w10: J1.8 987,73 1189.5,73 1204,87.5 1204,200 1222,218 v1(1569,218) ; v1(1212,1031) 1212,968.5 v1(1663.5,517)
pads on no net: J1.1 J5. J5.4 J5.5 MC1.19 MC1.22 U3.14 U3.15 U4.5 U4.6 U4.7 U6.1 U6.2 U6.3

## Polygon pours and split planes (outlines as drawn)
GND on Top Layer "GND_L01_P000" (hatched Horizontal grid 20 track 8, pour order 0): 30,2080 30,20 2560,20 2580,40 2580,440 2670,530 2670,1480 2540,1610 2540,2080
GND on Bottom Layer "GND_L02_P001" (hatched Horizontal grid 20 track 8, pour order 1): 40,2080 2492.03,2080 2547.36,2024.67 2547.36,1602.64 2670,1480 2670,530 2580,440 2580,40 50,40 30,20 30,2080

## Silkscreen, mask and mechanical layers (free items; w line width, h text height)
Top Overlay:
  text "Arduino_v1" at 1860,1700 h60
  text "TC" at 2360,1600 h30
BOARD_OUTLINE:
  the board outline again, w7.87

## Text inside footprints (layer, text, board x,y; h text height)
J5: Mechanical 13 "PCB EDGE" at -22.33,1604.68 h32.06 r270